# Altium PCB wifi relay controller PCB.PcbDoc
Units mm, origin at the board's own origin, x right, y up, seen from the top; angles counter-clockwise.
Board outline 34.04 x 41.15 mm, 2 copper layers (Top Layer, Bottom Layer); 21 components, 15 nets, 56 pads, 2 vias.
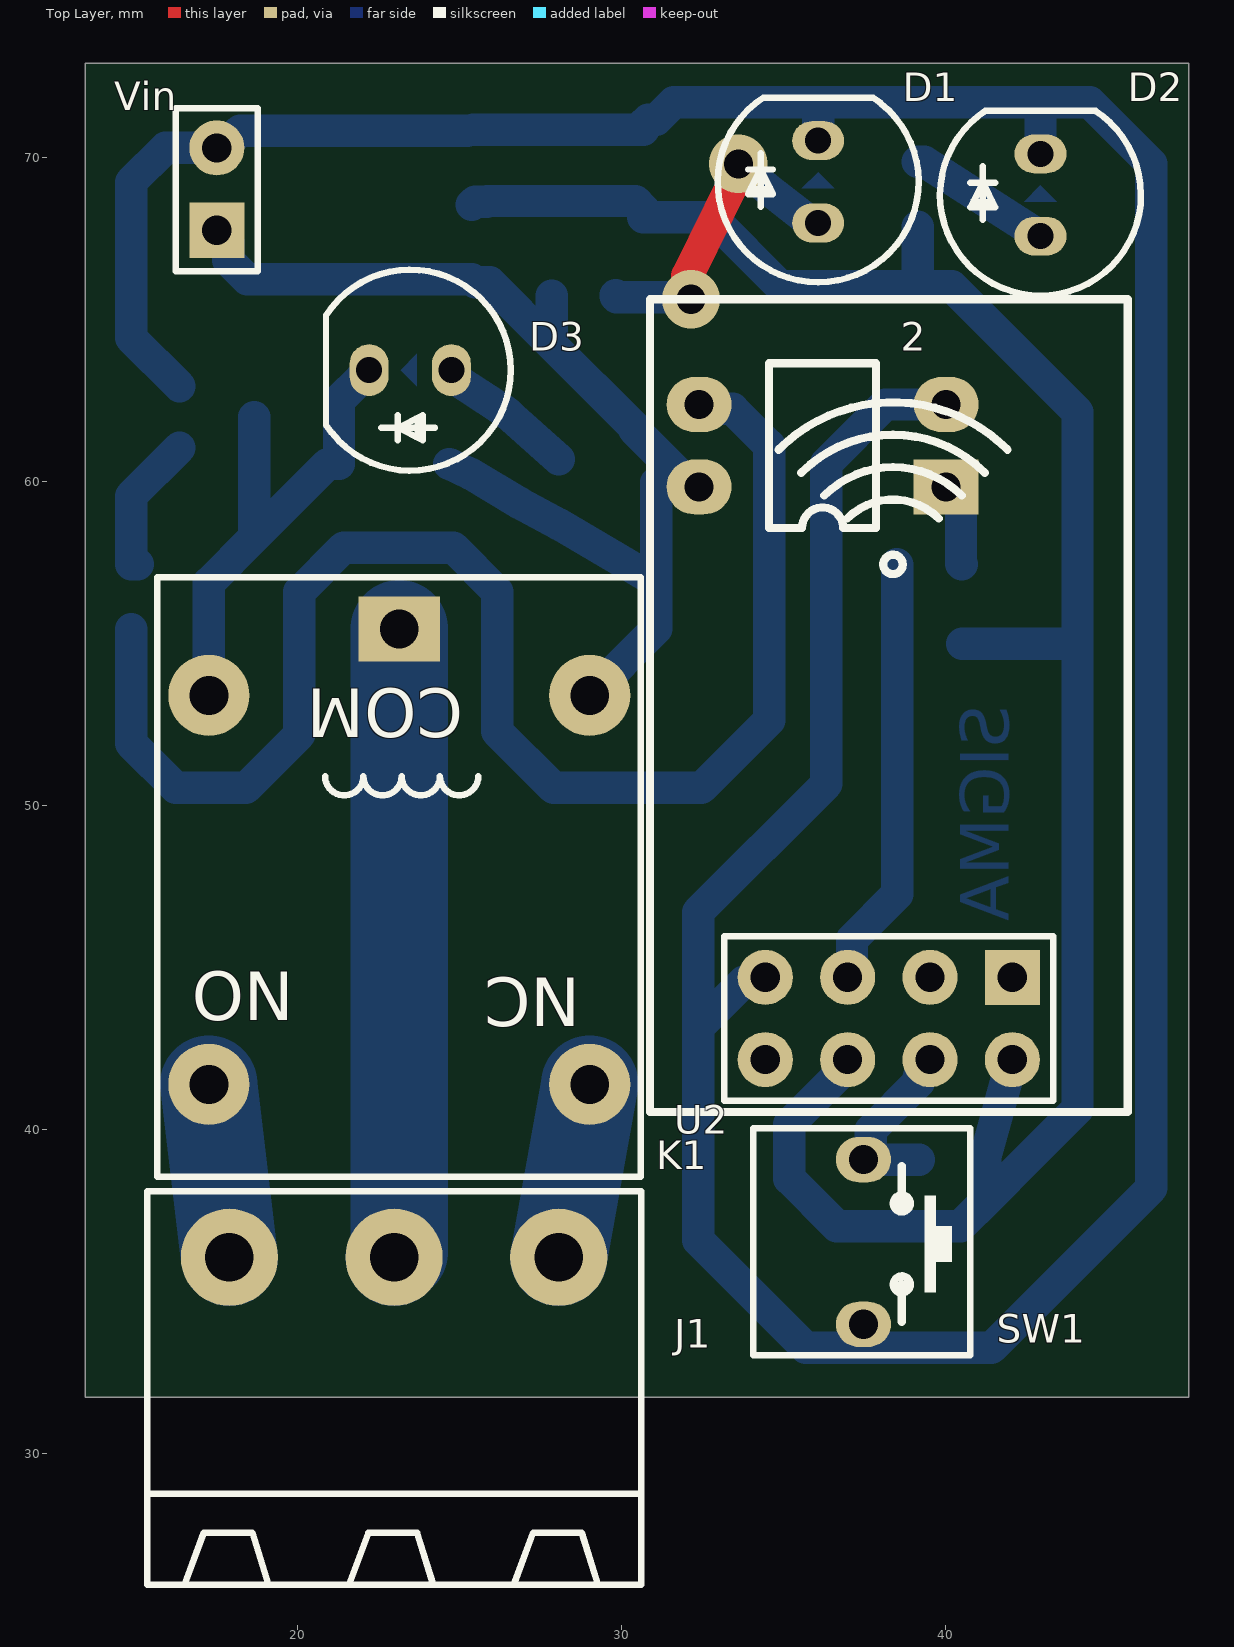
[diagram p0: Top Layer view]
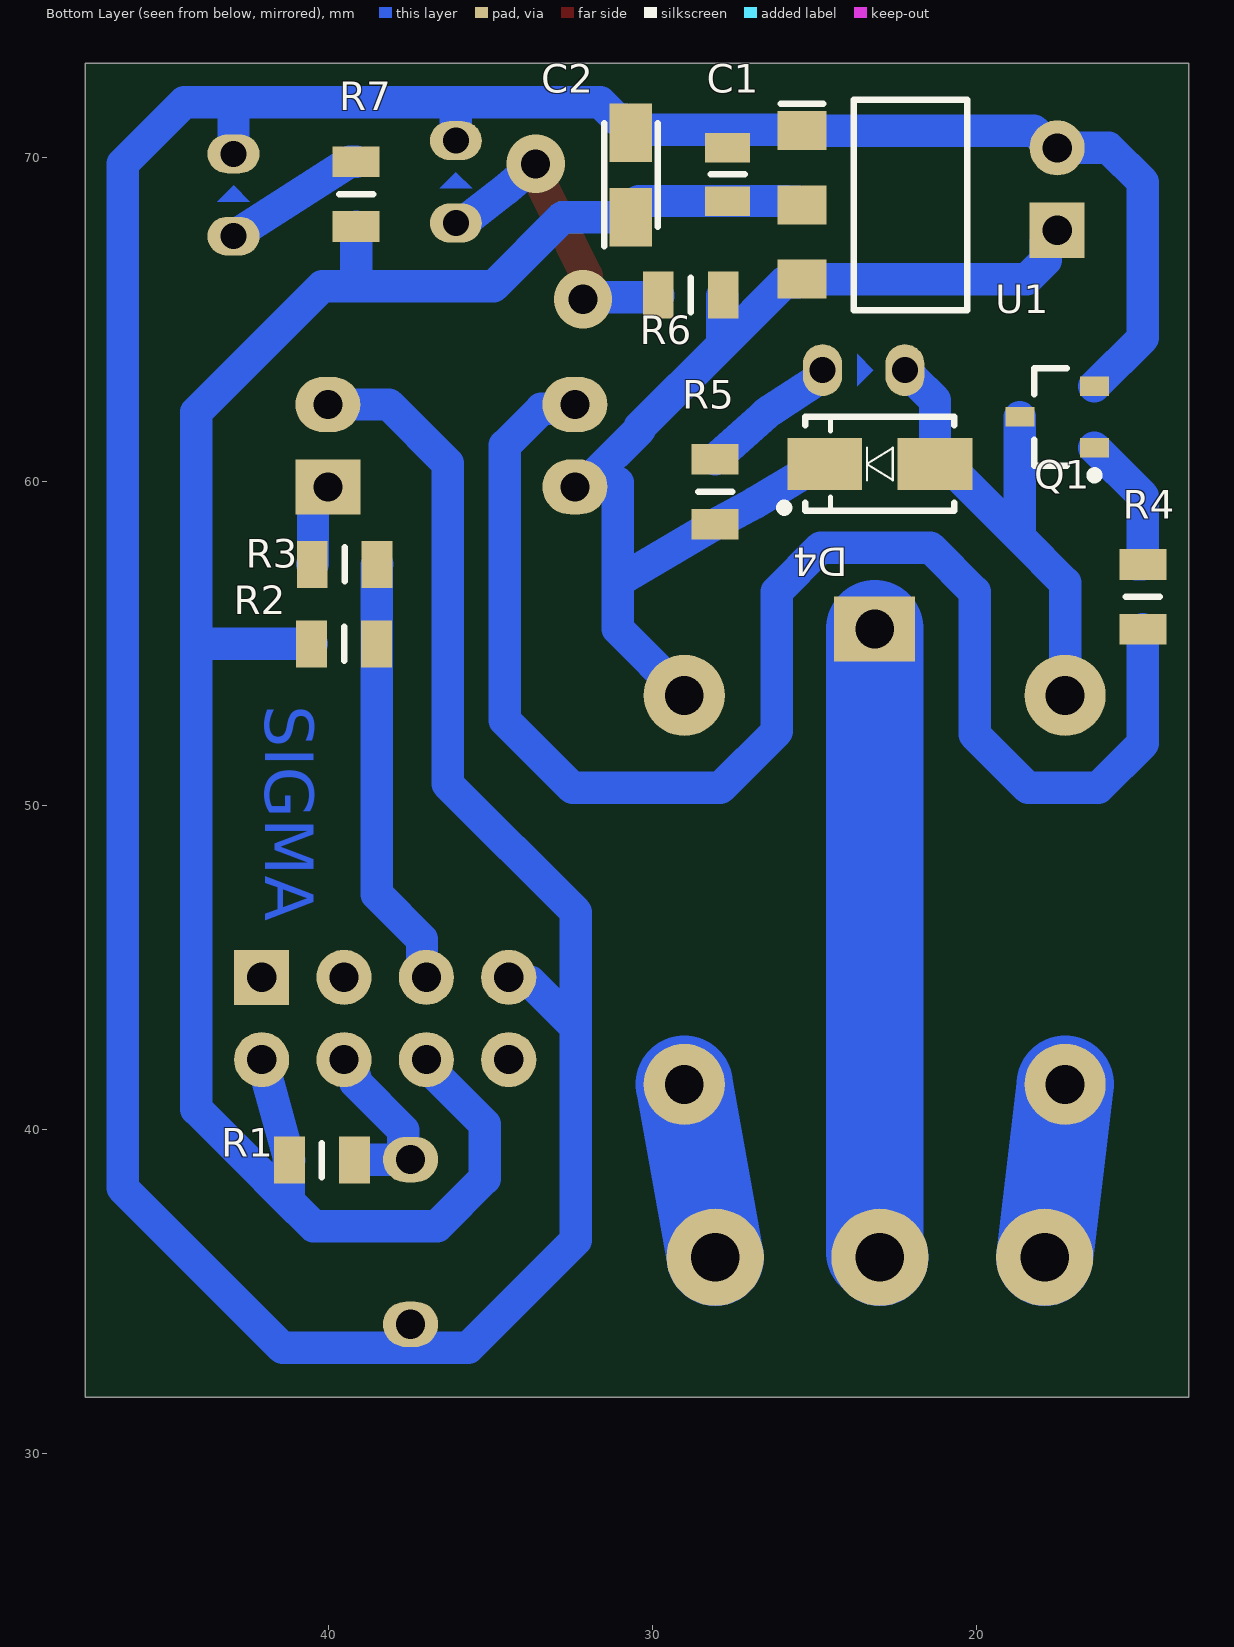
[diagram p1: Bottom Layer view, seen from below]
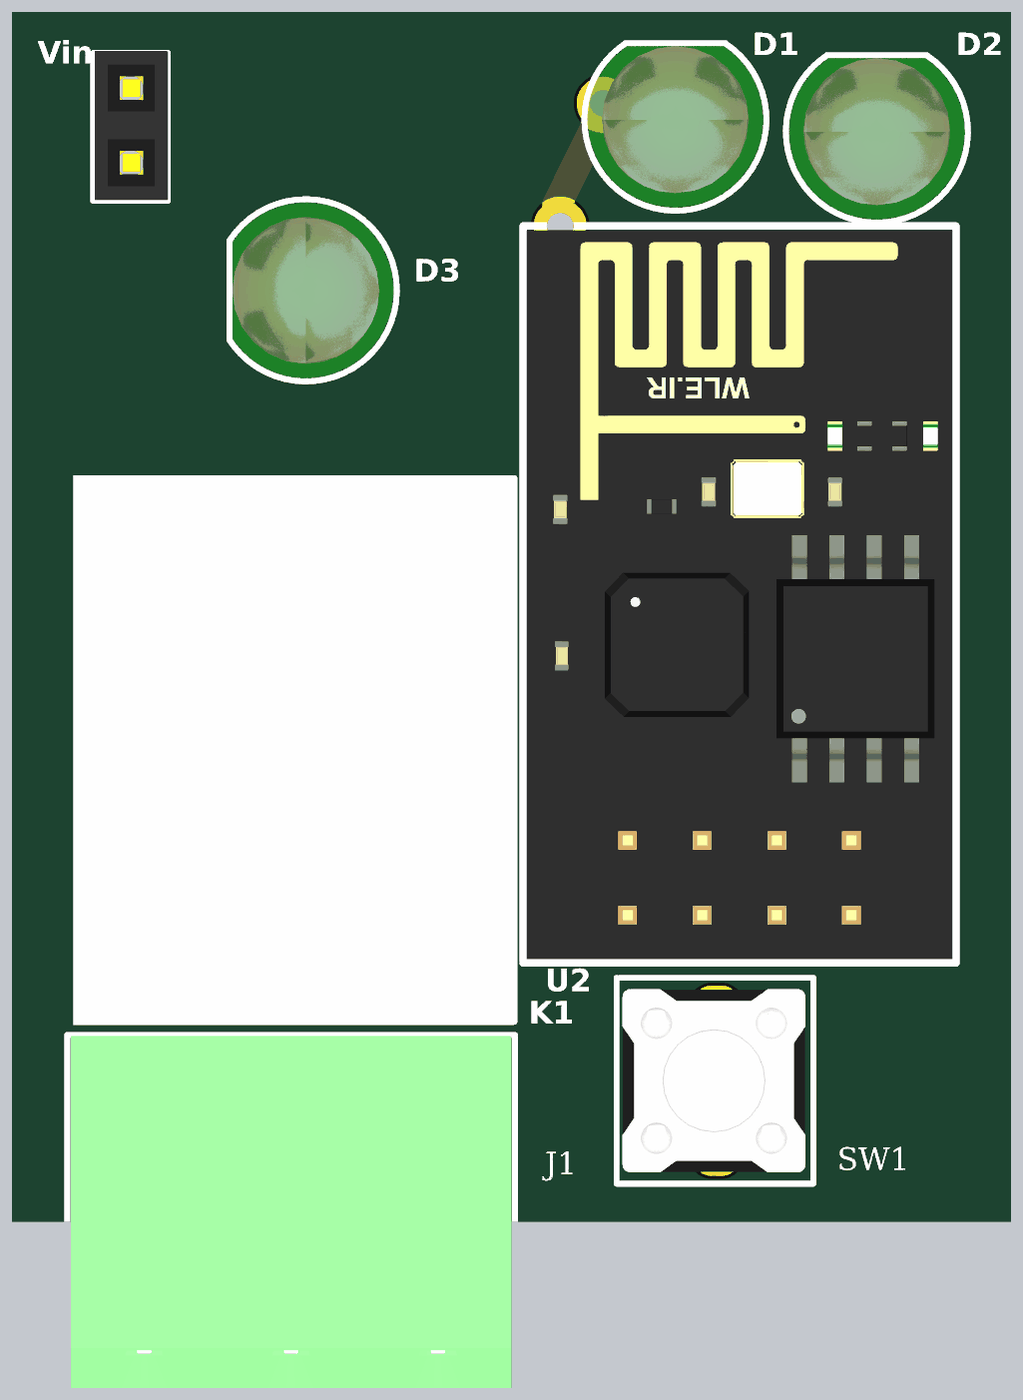
[diagram p2: 3D render of the assembled board from above, using the file's embedded part models]
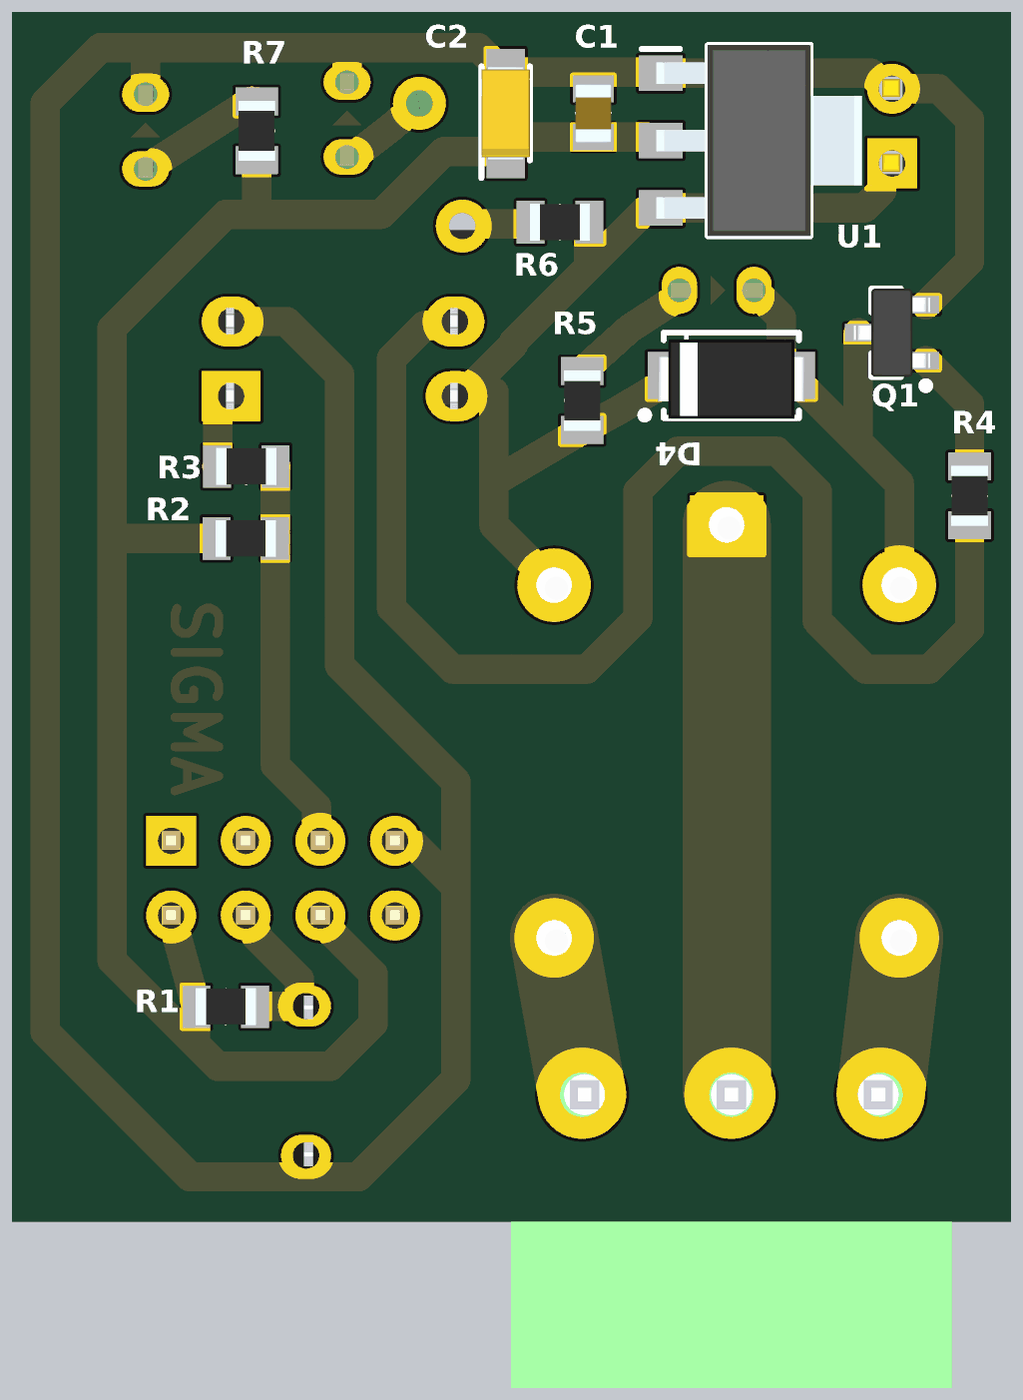
[diagram p3: 3D render of the assembled board from below, using the file's embedded part models]

## Layer stack, top to bottom
Top Solder: solder mask 0.0102, Solder Resist, Dk 3.5
Top Layer: signal copper 0.0356
Dielectric 1: dielectric 0.32, FR-4, Dk 4.8
Bottom Layer: signal copper 0.0356
Bottom Solder: solder mask 0.0102, Solder Resist, Dk 3.5

## Board outline
13.462,31.75 13.462,72.898 47.498,72.898 47.498,31.75

## Design rules (kind name [scope] priority, off if disabled: settings)
Clearance [All] p1: gap=0.3 ignorepadtopadclearanceinfootprint=FALSE
PolygonConnect [All] p1: connectstyle=Relief reliefconductorwidth=0.4 reliefentries=4 polygonreliefangle="90 Angle" airgapwidth=0.5
RoutingVias [All] p1: holewidth=0.6 width=1.5 viastyle="Through Hole" minholewidth=0.5 minwidth=1.5 maxholewidth=0.9 maxwidth=1.8
SolderMaskExpansion [All] p1: expansion=0.102 istentingtop=FALSE
Width [All] p1: maxlimit=3 minlimit=0.6 preferedwidth=1 minimp=50.000000 maximp=50.000000 favimp=50.000000
30 further rules are at their usual default settings.

## Components (designator, comment, footprint, x,y, rotation, side; value= is the part's Value field where it differs from the comment)
2 "PC817" PC817-DIP 40.002,59.819 r180 top (schematic designator U3)
C1 "100nf" CAP0805 27.686,69.469 r270 bottom
C2 "10uf/25v" "CAP tant A" 30.671,69.454 r90 bottom
D1 "LED_THD_GRN" LED5MM_GRN 36.068,69.241 r90 top
D2 "LED_THD_GRN" LED5MM_GRN 42.926,68.834 r90 top
D3 "LED_THD_GRN" LED5MM_GRN 23.487,63.433 r180 top
D4 "1n4007" "1N4007 SMD" 22.987,60.538 r0 bottom
J1 "CONN_TB3" MSTB_3 22.987,36.068 r180 top
K1 "relay 5v" relay 23.147,48.427 r180 top
Q1 "BC547 SMD" "BC547 SMD" 17.519,61.988 r0 bottom
R1 "10K" RES0805 40.198,39.063 r0 bottom
R2 "1K" RES0805 39.517,54.991 r0 bottom
R3 "1K" RES0805 39.499,57.441 r180 bottom
R4 "220" RES0805 14.878,56.441 r270 bottom
R5 "220" RES0805 28.067,59.682 r270 bottom
R6 "220" RES0805 28.822,65.751 r180 bottom
R7 "220" RES0805 39.144,68.86 r270 bottom
SW1 "?" "Sw_Tact 2PIN" 37.443,37.138 r270 top
U1 "ams1117-3.3v" AMS1117-3.3 22.039,68.529 r180 bottom
U2 "ESP8266" ESP8266 30.757,40.804 r0 top locked
Vin "Header 2" HDR1X2 17.519,67.749 r90 top

## Footprints (in the part's own frame and the unit in brackets; to place one, negate y for a bottom-side part, rotate by r counter-clockwise, add the part's x,y. Pads: shape width x height; smd on the part's side, far side on the other; paste and mask are expansions set on the pad)
"1N4007 SMD" [mm] "Diode M7"
  rect 2.3x1.6 smd: 1(-1.7,0) 2(1.7,0)
  silkscreen extent -2.3,-1.45 3.08,1.47, body extent -2.5,-1.22 2.5,1.48, height 2.2
AMS1117-3.3 [mm] "AMS1117-3.3"
  rect 1.5x1.2 smd: 1(-3.35,2.29) 2(-3.35,0) 3(-3.35,-2.29)
  silkscreen extent -4,-3.25 1.75,3.25, body extent -3.5,-3.25 3.5,3.25, height 1.8
"BC547 SMD" [mm] "NPN BJT"
  rect 0.9x0.6 smd: 1(-1.15,0.95) 2(-1.15,-0.95) 3(1.15,0)
  silkscreen extent -1.27,-1.5 0.7,1.92, body extent -1.3,-1.5 1.3,1.5, height 1
CAP0805 [mm] "CAPC2012X70N"
  rect 0.91x1.39 smd: 1(-0.82,0) 2(0.82,0)
  silkscreen extent 0,-0.53 0,0.53, body extent -0.98,-0.63 1.02,0.62, height 0.7
"CAP tant A" [mm] "CAPPM3216X180N"
  rect 1.8x1.3 smd: 1(-1.3,0) 2(1.3,0)
  silkscreen extent -2.2,-0.82 1.6,0.82, body extent -1.6,-0.82 1.6,0.83, height 1.8
ESP8266 [mm] "WiFI MODULE"
  rect 1.7x1.7 hole 0.9: 1(11.3,3.9)
  round 1.7 hole 0.9: 2(8.76,3.9) 3(6.22,3.9) 4(3.68,3.9) 5(11.3,1.36) 6(8.76,1.36) 7(6.22,1.36) 8(3.68,1.36)
  silkscreen extent 0.13,-0.25 14.86,24.82, body extent 0.24,-0.13 14.74,24.67, height 9.88
HDR1X2 [mm] "Connector; Header; 3 Position"
  rect 1.7x1.7 hole 0.9: 1(0,0)
  round 1.7 hole 0.9: 2(2.54,0)
  silkscreen extent -1.27,-1.27 3.76,1.27, body extent -1.24,-1.28 3.84,1.22, height 8.4
LED5MM_GRN [mm] "LED THD 5MM GREEN"
  oval 1.2x1.6 hole 0.8: 1(-1.27,0) 2(1.27,0)
  Bottom Layer region: -0.2,0.5 -0.2,-0.5 0.3,0
  silkscreen extent -3.1,-3.1 2.6,3.1, body extent -3,-3 2.5,3, height 9.14
MSTB_3 [mm] "PHOENIX MSTB 2, 5-G, 5.08mm pitch, 3pin"
  round 3 hole 1.5: 1(-5.08,0) 2(0,0) 3(5.08,0)
  silkscreen extent -7.62,-2.03 7.62,10.1, body extent -7.5,-2 7.5,10, height 8.6
PC817-DIP [mm]
  rect 2x1.7 hole 0.9: 1(-0.013,-0.013)
  oval 2x1.7 hole 0.9: 2(-0.013,-2.553) 3(7.607,-2.553) 4(7.607,-0.013)
  silkscreen extent 2.15,-3.82 5.45,1.26, body extent -0.18,-3.59 7.7,1, height 3.7
relay [mm]
  rect 2.5x2 hole 1.2: 1(0,-7.025)
  round 2.5 hole 1.2: 2(-5.875,7.025) 3(5.875,7.025) 4(-5.875,-4.975) 5(5.875,-4.975)
  silkscreen extent -7.44,-8.61 7.47,9.87, body extent -7.42,-8.72 7.58,9.98, height 15.7
RES0805 [mm] "RESC2012X50N"
  rect 0.95x1.45 smd: 1(-1,0) 2(1,0)
  silkscreen extent 0,-0.53 0,0.53, body extent -1.02,-0.62 1.03,0.63, height 0.5
"Sw_Tact 2PIN" [mm]
  oval 1.4x1.7 hole 0.9: 1(-1.944,0.022) 2(3.136,0.022)
  silkscreen extent -2.9,-3.38 4.1,3.32, body extent -2.52,-3.18 3.71,3.05, height 5

## Part data
C1: library part "CAP SMD PACKAGE", "CAPACITOR SMD"
C2: library part "CAP TANT SMD", "AVX - TAJA105K016RNJ - CAP, TANT, 1UF, 16V, CASE A"
D1 D2 D3: "LED, THD, GREEN"
D4: library part 1N4007
J1: library part CONN_MSTB_3, "CONN, PHOENIX MSTB, 5-G, 5.08mm pitch"
K1: library part relay, "relay 5 pin"
Q1: "NPN General-purpose Transistor"
R1 R2 R3 R4 R5 R6 R7: library part "RES SMD PACKAGE", "SMD RESISTOR PACK"
SW1: library part "Micro Switch"
U1: "1A LOW DROPOUT VOLTAGE REGULATOR, SOT-223", Manufacturer_Name="Advanced Monolithic Systems", Datasheet Link=http://www.advanced-monolithic.com/pdf/ds1117.pdf, Geometry.Height=1.8mm, Manufacturer_Part_Number=ams1117-3.3v
U2: "RF MODULE WiFi"
Vin: "Header, 2-Pin"

## Via types
v1: diameter 1.8, hole 0.9, Top Layer to Bottom Layer, 2 vias

## Nets (pads, with @x,y where several pads share a name; then routed paths per layer and width w, separated by ;. In a path a pad name is that pad's centre, name@x,y a point inside that pad or via, vN(x,y) a via of type N, cw(c..) or ccw(c..) an arc to the next point about the centre after c; other vN are vias at no path point)
+3.3v: C1.2 C2.1 R1.2 R2.2 R7.2 U1.2 U2.5 U2.7 | length 68.3
  Bottom Layer w1: U1.2 25.489,68.629 25.839,68.629 25.859,68.649 30.426,68.649 30.671,68.404 C2.1 32.771,68.154 34.906,66.019 39.144,66.019 ; U2.7 36.977,41.975 35.179,40.176 35.179,38.492 36.641,37.03 40.459,37.03 41.349,37.92 ; R7.2 39.144,66.019 ; R2.2 44.069,54.991 ; U2.5 R1.2 41.223,39.038 41.223,38.045 41.349,37.92 ; 39.144,66.019 40.192,66.019 44.069,62.142 44.069,54.991 ; 41.349,37.92 42.545,39.116 44.069,40.64 44.069,54.991
+5v: 2.4 D4.2 K1.4 R5.2 R6.2 U1.3 Vin.1 | length 35.7
  Bottom Layer w1: Vin.1 17.869,67.399 17.869,66.825 18.455,66.239 U1.3 ; D4.2 25.337,60.238 26.83,59.348 ccw(c27.342,60.207) 26.869,59.326 R5.2 31.071,56.916 ; U1.3@25.489,66.139 25.938,66.139 27.847,64.23 ; R6.2@27.847,65.726 27.847,64.23 ; K1.4 31.071,55.451 31.071,56.916 ; 2.4@32.111,59.966 31.071,59.966 31.071,56.916 ; 2.4 32.204,60.022 31.978,60.022 30.395,61.606 30.395,61.682 27.847,64.23
GND: 2.2 C1.1 C2.2 D1.2 D2.2 Q1.2 SW1.2 U1.1 U2.4 Vin.2 | length 125.2
  Bottom Layer w1: Q1.2 14.878,64.429 14.878,69.231 15.936,70.289 17.708,70.289 18.238,70.819 U1.1@25.239,70.819 ; U1.1@25.424,70.854 C2.2@30.671,70.854 ; C2.2@30.671,71.004 30.821,71.154 31.071,71.154 31.611,71.694 36.068,71.694 ; U2.4 34.303,44.57 33.775,44.57 32.363,43.158 ; D1.2 36.068,71.694 ; SW1.2 37.465,33.274 ; 2.2 38.134,62.372 36.322,60.56 36.322,50.673 32.363,46.714 32.363,43.158 ; D2.2 42.926,70.196 42.926,71.694 ; 32.363,43.158 32.363,36.598 35.687,33.274 37.465,33.274 ; 36.068,71.694 42.926,71.694 ; 37.465,33.274 41.413,33.274 46.348,38.209 46.348,69.796 44.45,71.694 42.926,71.694
GPIO2: R2.1 R3.2 U2.3 | length 13.4
  Bottom Layer w1: U2.3 37.111,44.838 37.111,45.874 38.508,47.271 38.508,54.991 38.508,57.432 R3.2
NetD1_1: D1.1 R6.1 | length 10.1
  Top Layer w1: v1(32.146,65.62) 32.088,65.792 32.034,65.948 32.034,66.346 33.484,69.291 33.484,69.672 v1(33.606,69.794)
  Bottom Layer w1: R6.1 29.822,65.71 29.847,65.685 32.081,65.685 v1(32.146,65.62) ; v1(33.606,69.794) 34.568,68.978 35.868,67.971 D1.1
NetD2_1: D2.1 R7.1 | length 4.5
  Bottom Layer w1: R7.1 39.336,69.865 42.817,67.634 42.817,67.564 D2.1
NetD3_1: D3.1 R5.1 | length 4.4
  Bottom Layer w1: D3.1 24.757,63.233 26.382,62.177 cw(c25.837,61.338) 26.505,62.083 R5.1
NetJ1_1: J1.1 K1.2 | length 5.4
  Bottom Layer w3: J1.1 K1.2
NetJ1_2: J1.2 K1.1 | length 19.5
  Bottom Layer w3: J1.2 23.147,36.228 K1.1
NetJ1_3: J1.3 K1.3 | length 5.4
  Bottom Layer w3: K1.3 J1.3
NetQ1_1: Q1.1 R4.1 | length 4.4
  Bottom Layer w1: R4.1@15.078,57.441 R4.1 14.878,59.547 Q1.1
NetR3_1: 2.1 R3.1 | length 2.7
  Bottom Layer w1: 2.1 40.124,59.832 40.474,59.482 40.474,57.466 R3.1
NetR4_2: 2.3 R4.2 | length 47
  Bottom Layer w1: R4.2 14.878,51.924 16.256,50.546 18.415,50.546 20.066,52.197 20.066,56.591 21.432,57.957 24.814,57.957 26.168,56.603 26.168,52.29 27.912,50.546 32.468,50.546 34.554,52.632 34.554,61.114 33.43,62.238 32.529,62.238 2.3
Relay: D3.2 D4.1 K1.5 Q1.3 | length 16.1
  Bottom Layer w1: K1.5 17.272,56.873 18.669,58.27 ; Q1.3 18.669,58.27 ; D3.2 22.217,63.288 22.125,63.195 21.979,63.195 21.287,62.503 D4.1 20.937,60.538 18.669,58.27
RST: R1.1 SW1.1 U2.6 | length 5.6
  Bottom Layer w1: SW1.1 R1.1@39.178,39.082 ; SW1.1@37.507,39.082 37.692,39.267 37.692,39.991 39.167,41.467 39.167,41.625 39.517,41.975 U2.6
pads on no net: U2.1 U2.2 U2.8

## Other copper
Bottom Layer:
  text "SIGMA" at 41.947,53.102 h1.5 r90

## Text inside footprints (layer, text, board x,y; h text height)
K1: Top Overlay "COM" at 25.128,53.609 h1.5 r180; Top Overlay "NO" at 19.896,44.871 h1.5 r180; Top Overlay "NC" at 28.735,44.693 h1.5 r180